# EAGLE board MCU board ATmega328p v2.4 (SN) (EAGLE 9.2.1)
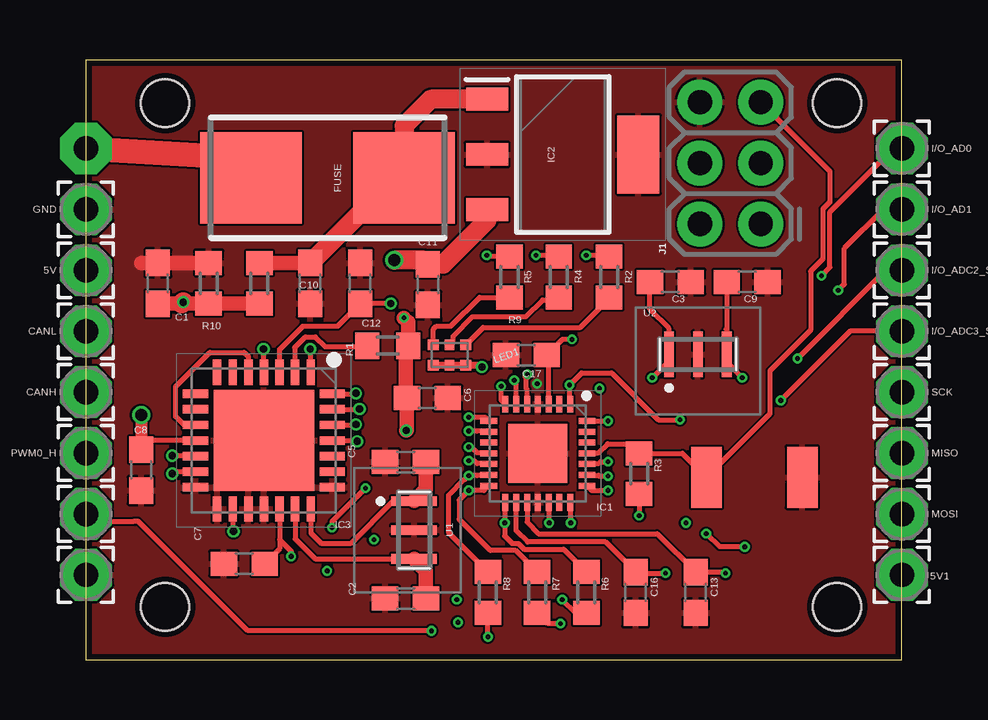
[diagram p0: board, top side]
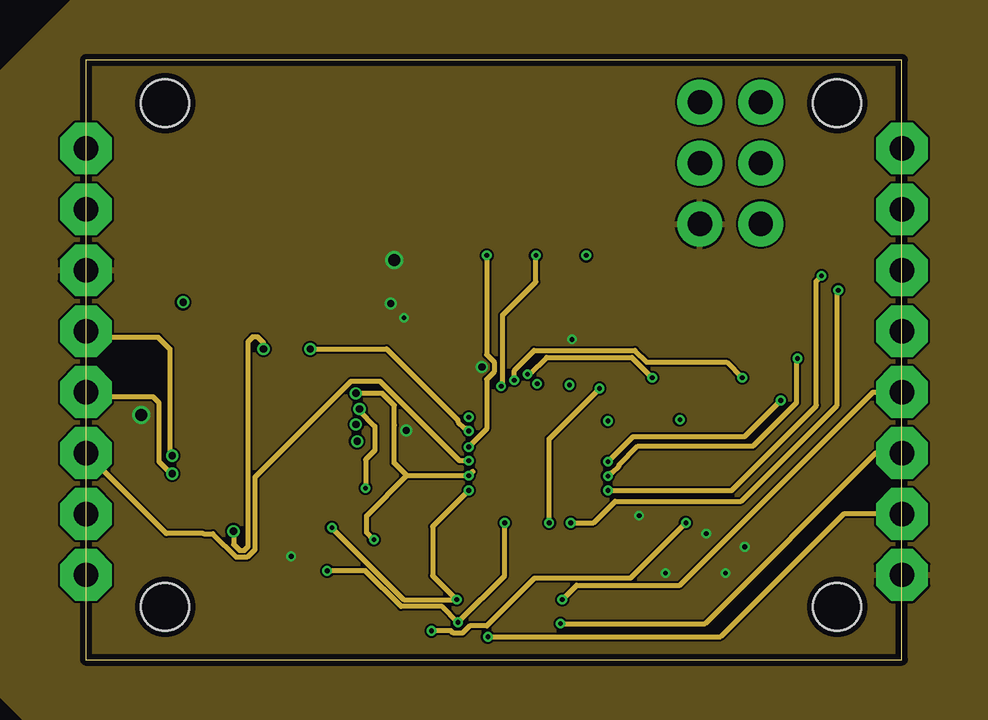
[diagram p1: board, inner layer Route2]
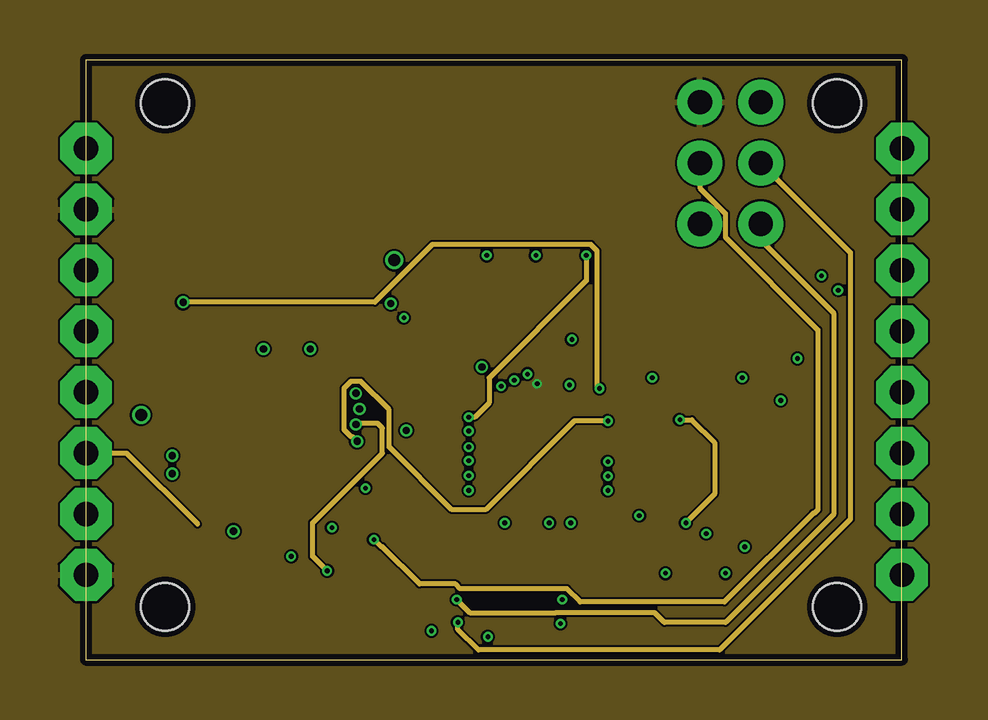
[diagram p2: board, inner layer Route3]
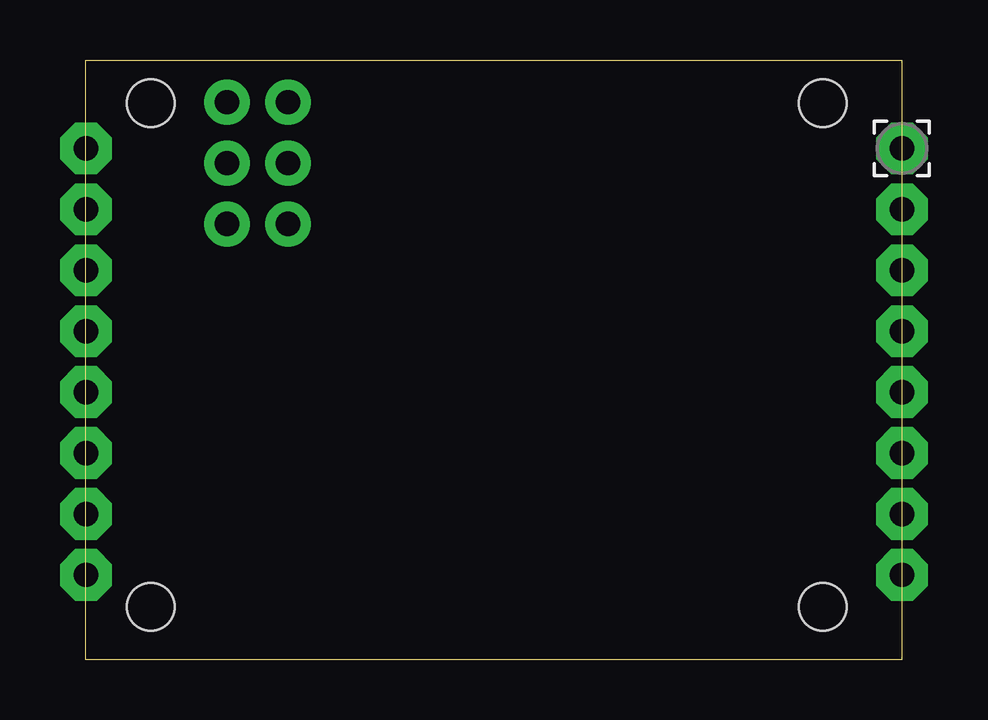
[diagram p3: board, bottom side, seen from below]

Size 34 x 25 mm. Coordinates in mm from the lower left corner, seen from the top.
Outline: 0,0 34,0 34,25 0,25 0,0
Copper layers (1*2*3*4): Top 0.035mm / dielectric 0.432mm / Route2 0.017mm / dielectric 0.432mm / Route3 0.017mm / dielectric 0.432mm / Route4 0.035mm
Design rules "JLC_4L_ACM_CAN *": minimum track width 3.5mil, minimum drill 0.2mm, track to track 3.5mil, track to pad 8mil, pad to pad 6mil, via to via 6mil, smd to smd 6mil, copper to edge 10mil, drill to drill 8mil, minimum pad ring 4mil, minimum via ring 4mil, stop-mask expansion 4mil, vias tented up to drill 25mil, thermal gap 4mil
Holes 2 mm at 3.3,23.2 31.3,23.2 3.3,2.2 31.3,2.2

## Footprints (pad centres in the part's own frame; a part is rotated, then mirrored left to right if it is on the bottom)
2,15/1,0 = drill 1.016 pad 2.159 octagon: 1 0,0
C0603 = smd 1.1 x 1: 1 -0.85,0; 2 0.85,0
0154001.DRT = smd 4.242 x 3.81: 1 -3.188,0; 2 3.188,0
QFN45P400X400X100-29N = smd 0.7 x 0.25: 1 -2.05,1.35; 2 -2.05,0.9; 3 -2.05,0.45; 4 -2.05,0; 5 -2.05,-0.45; 6 -2.05,-0.9; 7 -2.05,-1.35; 15 2.05,-1.35; 16 2.05,-0.9; 17 2.05,-0.45; 18 2.05,0; 19 2.05,0.45; 20 2.05,0.9; 21 2.05,1.35 | smd 0.25 x 0.7: 8 -1.35,-2.05; 9 -0.9,-2.05; 10 -0.45,-2.05; 11 0,-2.05; 12 0.45,-2.05; 13 0.9,-2.05; 14 1.35,-2.05; 22 1.35,2.05; 23 0.9,2.05; 24 0.45,2.05; 25 0,2.05; 26 -0.45,2.05; 27 -0.9,2.05; 28 -1.35,2.05 | smd 2.45 x 2.45: 29 0,0
SOT230P700X170-4N = smd 1.75 x 0.95: 1 -3.15,2.3; 2 -3.15,0; 3 -3.15,-2.3 | smd 1.75 x 3.25: 4 3.15,0
QFN65P600X600X100-29N = smd 1.05 x 0.35: 1 -2.85,1.95; 2 -2.85,1.3; 3 -2.85,0.65; 4 -2.85,0; 5 -2.85,-0.65; 6 -2.85,-1.3; 7 -2.85,-1.95; 15 2.85,-1.95; 16 2.85,-1.3; 17 2.85,-0.65; 18 2.85,0; 19 2.85,0.65; 20 2.85,1.3; 21 2.85,1.95 | smd 0.35 x 1.05: 8 -1.95,-2.85; 9 -1.3,-2.85; 10 -0.65,-2.85; 11 0,-2.85; 12 0.65,-2.85; 13 1.3,-2.85; 14 1.95,-2.85; 22 1.95,2.85; 23 1.3,2.85; 24 0.65,2.85; 25 0,2.85; 26 -0.65,2.85; 27 -1.3,2.85; 28 -1.95,2.85 | smd 4.2 x 4.2: 29 0,0
2X3-NS = drill 1.016 pad 1.88: 1 -2.54,-1.27; 2 -2.54,1.27; 3 0,-1.27; 4 0,1.27; 5 2.54,-1.27; 6 2.54,1.27
ROHM-1510-(0604) = smd 0.45 x 0.45: 1 -0.675,-0.425; 3 0.675,-0.425; 4 0.675,0.425; 6 -0.675,0.425 | smd 0.4 x 0.45: 2 0,-0.425; 5 0,0.425
R0603 = smd 1 x 1.1: 1 -0.85,0; 2 0.85,0
SMD1,27-2,54 = smd 1.27 x 2.54: 1 0,0
CSTNE16M0V530000R0 = smd 0.4 x 1.9: 1 -1.2,0.425; 2 0,0.425; 3 1.2,0.425

## Placement (x,y rotation side)
5V  5V_H  [2,15/1,0]  0,16.23 0 top
5V1  5V_LFT0  [2,15/1,0]  34,3.53 90 top
12V_H  12V  [2,15/1,0]  0,21.31 0 bottom
C1  0.1uF  [C0603]  3,15.69 90 top
C2  22pF  [C0603]  13.32,2.55 180 top
C3  22pF  [C0603]  24.35,15.75 0 top
C5  22pF  [C0603]  13.32,8.24 180 top
C6  0.1uF  [C0603]  14.22,10.9 0 top
C7  0.1uF  [C0603]  6.6,4 180 top
C8  0.1uF  [C0603]  2.3,7.9 270 top
C9  22pF  [C0603]  27.55,15.75 0 top
C10  10uF  [C0603]  9.34,15.69 270 top
C11  10uF  [C0603]  14.25,15.64 270 top
C12  0.1uF  [C0603]  11.43,15.69 90 top
C13  0.1uF  [C0603]  25.4,2.8 270 top
C16  0.1uF  [C0603]  22.9,2.8 270 top
C17  0.1uF  [C0603]  18.35,12.7 180 top
CANH  I/O_CANH_H  [2,15/1,0]  0,11.15 0 top
CANL  I/O_CANH_H  [2,15/1,0]  0,13.69 0 top
FUSE  0154005.DRT  [0154001.DRT]  10.07,20.09 0 top
GND  GND_H  [2,15/1,0]  0,18.77 0 top
GND30_H  GND  [2,15/1,0]  0,3.53 0 top
I/O_AD0  I/O_AD0_LFT7  [2,15/1,0]  34,21.31 90 top
I/O_AD1  I/O_AD1_LFT6  [2,15/1,0]  34,18.77 90 top
I/O_ADC2_SDA  I/O_ADC2_SDA_LFT5  [2,15/1,0]  34,16.23 90 top
I/O_ADC3_SCL  I/O_ADC3_SCL_LFT4  [2,15/1,0]  34,13.69 90 top
IC1  ATMEGA328P-MMH  [QFN45P400X400X100-29N]  18.83,8.6 270 top
IC2  MIC5239-5.0YS_TR  [SOT230P700X170-4N]  19.87,21.06 0 top
IC3  MCP25625-E_ML  [QFN65P600X600X100-29N]  7.42,9.13 270 top
J1  AVR_SPI_PROG_3X2NS  [2X3-NS]  26.85,20.7 90 top
LED1  SMLP36RGB2W3R  [ROHM-1510-(0604)]  15.15,12.7 180 top
MISO  MISO_LFT2  [2,15/1,0]  34,8.61 90 top
MOSI  MOSI_LFT1  [2,15/1,0]  34,6.07 90 top
PWM0_H  PWM0  [2,15/1,0]  0,8.61 0 top
PWM1_INT1_H  PWM0_INT  [2,15/1,0]  0,6.07 180 top
R1  10kOhm  [R0603]  12.57,13.09 180 top
R2  200Ohm  [R0603]  21.8,15.95 270 top
R3  10kOhm  [R0603]  23.05,7.75 270 top
R4  290Ohm  [R0603]  19.7,15.95 270 top
R5  190Ohm  [R0603]  17.65,15.95 270 top
R6  200Ohm  [R0603]  20.85,2.8 270 top
R7  200Ohm  [R0603]  18.8,2.8 270 top
R8  200Ohm  [R0603]  16.75,2.8 270 top
R9  3kOhm  [R0603]  7.22,15.69 90 top
R10  2kOhm  [R0603]  5.11,15.69 270 top
RES_PAD1  RES_PAD  [SMD1,27-2,54]  25.85,7.6 180 top
RES_PAD2  RES_PAD2  [SMD1,27-2,54]  29.85,7.6 180 top
SCK  SCK_LFT3  [2,15/1,0]  34,11.15 90 top
U1  CSTNE16M0V530000R0  [CSTNE16M0V530000R0]  13.25,5.4 270 top
U2  CSTNE16M0V530000R0  [CSTNE16M0V530000R0]  25.5,12.3 0 top

## Library data of the parts
5V 5V1 12V_H CANH CANL GND GND30_H I/O_AD0 I/O_AD1 I/O_ADC2_SDA I/O_ADC3_SCL MISO MOSI PWM0_H PWM1_INT1_H RES_PAD1 RES_PAD2 SCK = wirepad
C1-C3 C5-C13 C16 C17 = eagle-ltspice; SPICEMODEL: NONE; SPICEPREFIX: C
FUSE = 0154005(Fuseholder)DRT; ALLIED_NUMBER: 70184875; ALLIED_PRICE-STOCK: https://www.alliedelec.com/littelfuse-0154005-drt/70184875/; ARROW_PART_NUMBER: 0154005.DRT; ARROW_PRICE-STOCK: https://www.arrow.com/en/products/0154005.drt/littelfuse; DESCRIPTION: Littelfuse 5A T Surface Mount Fuse, 125V ac/dc; HEIGHT: mm; MANUFACTURER_NAME: LITTELFUSE; MANUFACTURER_PART_NUMBER: 0154005.DRT; RS_PART_NUMBER: 2196260P; RS_PRICE-STOCK: http://uk.rs-online.com/web/p/products/2196260P
IC1 = ATMEGA328P-MMH; ARROW_PART_NUMBER: ATMEGA328P-MMH; ARROW_PRICE-STOCK: https://www.arrow.com/en/products/atmega328p-mmh/microchip-technology; DESCRIPTION: Atmel ATMEGA328P-MMH, 8bit AVR Microcontroller, 20MHz, 32 kB Flash, 28-Pin QFN; HEIGHT: 1mm; MANUFACTURER_NAME: Microchip; MANUFACTURER_PART_NUMBER: ATMEGA328P-MMH; RS_PART_NUMBER: 1310272P; RS_PRICE-STOCK: http://uk.rs-online.com/web/p/products/1310272P
IC2 = MIC5239-5.0YS_TR; ARROW_PART_NUMBER: MIC5239-5.0YS TR; ARROW_PRICE-STOCK: http://uk.rs-online.com/web/p/products/7275535P; DESCRIPTION: LDO Regulator Pos 5V 0.5A Micrel MIC5239-5.0YS TR, LDO Voltage Regulator, 500mA, 5 V 1%, 2.3 30 Vin, 3 + Tab-Pin SOT-223; HEIGHT: 1.7mm; MANUFACTURER_NAME: Micrel; MANUFACTURER_PART_NUMBER: MIC5239-5.0YS TR; RS_PART_NUMBER: 7275535P; RS_PRICE-STOCK: http://uk.rs-online.com/web/p/products/7275535P
IC3 = MCP25625-E_ML; ALLIED_NUMBER: 70431541; ALLIED_PRICE-STOCK: http://www.alliedelec.com/microchip-technology-inc-mcp25625-e-ml/70431541/; ARROW_PART_NUMBER: MCP25625-E/ML; ARROW_PRICE-STOCK: https://www.arrow.com/en/products/mcp25625-eml/microchip-technology; DESCRIPTION: CAN Controller with Transceiver QFN28 Microchip MCP25625-E/ML, CAN Controller, 28-Pin QFN; HEIGHT: 1mm; MANUFACTURER_NAME: Microchip; MANUFACTURER_PART_NUMBER: MCP25625-E/ML; RS_PART_NUMBER: 1654104; RS_PRICE-STOCK: http://uk.rs-online.com/web/p/products/1654104
J1 = SparkFun-Connectors
LED1 = SMLP36RGB2W3R; ARROW_PART_NUMBER: SMLP36RGB2W3R; ARROW_PRICE-STOCK: https://www.arrow.com/en/products/smlp36rgb2w3r/rohm-semiconductor; DESCRIPTION: LED,RGB,35/110/35mcd,top-looking,1510 ROHM SMLP36RGB2W3R, SML-P36 Series 3 RGB LED, 475 (Blue) nm, 535 (Green) nm, 629 (Red) nm 6-Pin Milky White; HEIGHT: mm; MANUFACTURER_NAME: ROHM Semiconductor; MANUFACTURER_PART_NUMBER: SMLP36RGB2W3R; RS_PART_NUMBER: 1246884P; RS_PRICE-STOCK: http://uk.rs-online.com/web/p/products/1246884P
R1-R10 = eagle-ltspice; SPICEMODEL: NONE; SPICEPREFIX: R
U1 U2 = CSTNE16M0V530000R0; ARROW_PART_NUMBER: CSTNE16M0V530000R0; ARROW_PRICE-STOCK: https://www.arrow.com/en/products/cstne16m0v530000r0/murata-manufacturing; DESCRIPTION: Resonators 16.0000MHz 15pF SMD CHP Resntr; HEIGHT: 1mm; MANUFACTURER_NAME: Murata Electronics; MANUFACTURER_PART_NUMBER: CSTNE16M0V530000R0

## Nets
5V: 5V1.1 5V.1 C6.1 C7.1 C8.1 C11.1 C12.1 C13.1 C16.1 C17.1 IC1.3 IC1.16 IC1.17 IC2.3 IC3.3 IC3.11 IC3.19 J1.2 LED1.4 LED1.5 LED1.6 R1.1 R3.2
12V_FUSED: C10.1 FUSE.2 IC2.1 R9.2
12V_UNFUSED: 12V_H.1 FUSE.1
BLUE_LED: IC1.11 R5.1
CAN_CS: IC1.9 IC3.1
CAN_INT: IC1.28 IC3.25
CAN_OSC1: C5.1 IC3.21 U1.1
CAN_OSC2: C2.1 IC3.20 U1.3
CANH: CANH.1 IC3.13
CANL: CANL.1 IC3.12
GND: C1.2 C2.2 C3.2 C5.2 C6.2 C7.2 C8.2 C9.2 C10.2 C11.2 C12.2 C13.2 C16.2 C17.2 GND30_H.1 GND.1 IC1.4 IC1.18 IC1.29 IC2.2 IC2.4 IC3.14 IC3.15 IC3.17 IC3.18 IC3.22 IC3.29 J1.6 R10.1 RES_PAD2.1 U1.2 U2.2
GREEN_LED: IC1.8 R2.1
I/O_ADC3: I/O_ADC3_SCL.1 IC1.24
I/O_D2_INT: IC1.1 PWM1_INT1_H.1
I/OAD0: I/O_AD0.1 IC1.22
I/OADC2: I/O_ADC2_SDA.1 IC1.23
MCU_OSC1: C3.1 IC1.5 U2.1
MCU_OSC2: C9.1 IC1.6 U2.3
MISO: IC1.14 IC3.27 J1.1 R7.1
MOSI: IC1.13 IC3.28 J1.4 R8.1
N$1: IC3.2 R1.2
N$2: IC1.12 PWM0_H.1
N$3: I/O_AD1.1 IC1.21
N$4: LED1.1 R2.2
N$8: LED1.2 R4.2
N$9: LED1.3 R5.2
N$10: R6.2 SCK.1
N$11: MISO.1 R7.2
N$12: MOSI.1 R8.2
RED_LED: IC1.7 R4.1
RESET_MCU: IC1.25 J1.5 R3.1 RES_PAD1.1
RXCAN: IC3.5 IC3.10
SCK: IC1.15 IC3.26 J1.3 R6.1
TXCAN: IC3.4 IC3.16
VOLTAGE_CHECK: C1.1 IC1.19 R9.1 R10.2

## Tracks (layer width: path | path; a pad name or v marks a point on that pad's centre or on a via)
5V  (via drill 0.2 layers 1-4, 0.3 layers 1-4, 0.5 layers 1-4)
  Top 0.2: 4.54,9.1 IC3.11 2.73,9.13 2.35,8.75 C8.1 | C12.1 11.2,15.09 | C12.1 10.47,13.89 9.03,13.89 8.07,12.93 IC3.3 | v12.7,14.85 C12.1 | 18.75,12.7 C17.1 | IC3.19 8.07,5 | 8.07,5 8.07,4.62 C7.1 | v20.25,13.35 19.85,13.35 C17.1 | IC1.3 19.26,10.67 19.26,12.64 C17.1 | IC1.16 17.93,5.37 18.4,4.9 21.65,4.9 C16.1 22.95,3.6 v24.15,3.6 | IC1.17 18.38,5.72 18.85,5.25 23.8,5.25 C13.1 26.6,3.65 v26.65,3.6 | R3.2 v23.05,6 | 8.07,5 8.55,4.52 v8.55,4.3 | v27.45,4.7 26.4,4.7 v25.85,5.25
  Top 0.3: LED1.4 LED1.5 LED1.6 16.43,12.28 v16.5,12.2
  Top 0.305: LED1.4 14.45,12.25
  Top 0.5: v2.3,10.2 C8.1
  Top 0.6: v13.35,9.55 13.38,9.57 C6.1 13.32,10.95 13.32,12.99 R1.1 13.43,14.07 v13.25,14.25
  Top 0.8: 14.4,16.49 C11.1 | IC2.3 16.72,18.32 14.89,16.49 C11.1 | C11.1 14.09,16.65 v12.85,16.65
  pour Route2: -16.5,11.5 1,29 39,29 44,24 44,-2 37,-9 4,-9
12V_FUSED
  Top 0.6: C10.1 R9.2
  Top 0.8: C10.1 13.26,20.46 FUSE.2 13.26,22.26 14.36,23.36 IC2.1
12V_UNFUSED
  Top 1.016: FUSE.1 6.02,20.95 12V_H.1
BLUE_LED  (via drill 0.2 layers 1-4)
  Top 0.2: R5.1 16.75,16.8 v16.7,16.85 | IC1.11 16.76,8.62 16.3,8.62 16.07,8.86 v15.95,8.86
  Route2 0.2: v15.95,8.86 16.7,9.61 16.7,11.69 17,11.99 17,12.41 16.7,12.71 v16.7,16.85
CAN_CS  (via drill 0.2 layers 1-4, 0.3 layers 1-4)
  Top 0.2: IC3.1 9.37,12.93 v9.35,12.95 | IC1.9 16.76,9.52 16.3,9.52 16.3,9.53 v15.95,9.53
  Route2 0.2: v9.35,12.95 12.53,12.95 15.5,9.98 15.5,9.91 15.76,9.65 15.83,9.65 v15.95,9.53
CAN_INT  (via drill 0.2 layers 1-4, 0.3 layers 1-4)
  Top 0.2: IC3.25 11.3,9.13 v11.3,9.1 | IC1.28 v21.75,9.95
  Route3 0.2: v21.75,9.95 20.35,9.95 16.65,6.25 15.25,6.25 12.64,8.86 12.64,10.42 11.46,11.6 11.04,11.6 10.75,11.31 10.75,9.59 11.04,9.3 11.1,9.3 v11.3,9.1
CAN_OSC1
  Top 0.2: U1.1 12.81,6.61 11.05,4.85 9.8,4.85 9.37,5.28 IC3.21 9.35,6.26
  Top 0.6: C5.1 14.17,7.09 U1.1
CAN_OSC2
  Top 0.2: IC3.20 8.72,5.03 9.55,4.2 U1.3
  Top 0.6: C2.1 14.17,3.71 U1.3
CANH  (via drill 0.3 layers 1-4)
  Top 0.2: IC3.13 3.68,7.83 v3.6,7.75
  Route2 0.2: v3.6,7.75 3.55,7.75 3.05,8.25 3.05,10.7 2.8,10.95 0.16,10.95 CANH.1
CANL  (via drill 0.3 layers 1-4)
  Top 0.2: IC3.12 3.62,8.48 v3.6,8.5
  Route2 0.2: v3.6,8.5 3.5,8.6 3.5,12.95 3.02,13.43 0.1,13.43 CANL.1
GND  (via drill 0.2 layers 1-4)
  Top 0.6: R10.1 C1.2 2.3,16.54
  other vias: 18.8,11.5
  pour Route3: -15,20 -5,30 -2,30 45,30 48,27 48,25 48,-1 47,-2 47,-4 39,-12 -6,-12 -15,-3
  pour Top: 34,0 0,0 0,25 34,25
GREEN_LED  (via drill 0.2 layers 1-4)
  Top 0.2: R2.1 21.75,16.85 v20.85,16.85 | IC1.8 16.63,10.1 v15.95,10.1
  Route3 0.2: v20.85,16.85 20.85,15.8 16.8,11.75 16.8,10.7 16.2,10.1 v15.95,10.1
I/O_ADC3  (via drill 0.2 layers 1-4)
  Top 0.2: v28.95,10.8 31.84,13.69 I/O_ADC3_SCL.1 | IC1.24 20.9,8.17 21.36,8.17 21.43,8.25 v21.75,8.25
  Route2 0.2: v21.75,8.25 22.8,9.3 27.45,9.3 v28.95,10.8
I/O_D2_INT  (via drill 0.2 layers 1-4)
  Top 0.2: IC1.1 20.16,10.67 20.16,11.13 20.15,11.13 v20.15,11.45 20.65,11.95 21.9,11.95 23.85,10 v24.75,10 | v14.4,1.2 6.75,1.2 2.18,5.77 2,5.77 0.3,5.77 | 0.3,5.77 0.1,5.77 | PWM1_INT1_H.1 0.3,5.77
  Route2 0.2: v25,5.7 22.69,3.39 18.69,3.39 16.7,1.4 16,1.4 15.69,1.1 15.31,1.1 15.21,1.2 v14.4,1.2
  Route3 0.2: v24.75,10 25.25,10 26.2,9.05 26.2,6.9 v25,5.7
I/OAD0  (via drill 0.2 layers 1-4)
  Top 0.2: v30.65,16 31,16.35 31,18.66 33.65,21.31 I/O_AD0.1 | IC1.22 21.08,7.05 v21.75,7.05
  Route2 0.2: v21.75,7.05 26.9,7.05 30.43,10.57 | 30.43,10.57 30.45,10.6 | 30.43,10.57 30.43,15.78 v30.65,16
I/OADC2  (via drill 0.2 layers 1-4)
  Top 0.2: v29.65,12.55 33.33,16.23 I/O_ADC2_SDA.1 | IC1.23 20.9,7.68 21.36,7.68 21.38,7.65 v21.75,7.65
  Route2 0.2: v21.75,7.65 21.9,7.8 21.94,7.8 22.2,8.06 22.2,8.1 23,8.9 27.8,8.9 29.6,10.7 29.6,12.5 v29.65,12.55
MCU_OSC1  (via drill 0.2 layers 1-4)
  Top 0.2: C3.1 23.5,14.6 24.3,13.8 U2.1 24.3,12.45 v23.6,11.75 | 18.38,11.72 18.3,11.8 | IC1.5 18.38,11.28 18.35,11.31 18.35,11.69 18.38,11.72 | v18.4,11.9 18.38,11.88 18.38,11.72
  Route2 0.2: v18.4,11.9 18.5,11.9 19.2,12.6 22.75,12.6 v23.6,11.75
MCU_OSC2  (via drill 0.2 layers 1-4)
  Top 0.2: C9.1 U2.3 | U2.3 26.7,13.8 26.68,13.78 | IC1.6 17.93,11.57 v17.85,11.65 | U2.3 26.7,12.4 v27.35,11.75
  Route2 0.2: v17.85,11.65 17.85,12.06 18.68,12.89 22.87,12.89 23.36,12.4 26.7,12.4 v27.35,11.75
MISO  (via drill 0.2 layers 1-4, 0.3 layers 1-4)
  Top 0.2: IC3.27 11.38,10.43 v11.4,10.45 | IC1.14 16.58,7.05 v15.95,7.05 15.55,6.65 15.55,5.85 16.85,4.55 17.9,4.55 R7.1 | v11.65,7.15 10.25,5.75 v10.25,5.5
  Route2 0.2: v15.95,7.05 14.45,5.55 14.45,3.5 v15.45,2.5 13.25,2.5 v10.25,5.5 | v11.4,10.45 11.4,10.36 12.04,9.72 12.04,8.73 11.65,8.33 v11.65,7.15
  Route3 0.2: J1.1 28.12,17.48 31.15,14.45 31.15,6.05 26.65,1.55 24.1,1.55 23.7,1.95 19.59,1.95 19.58,1.95 16,1.95 v15.45,2.5
MOSI  (via drill 0.2 layers 1-4, 0.3 layers 1-4)
  Top 0.2: IC3.28 11.23,11.08 v11.25,11.1 | IC1.13 16.76,7.68 16.3,7.68 16.3,7.67 v15.95,7.67 15.78,7.5 15.76,7.5 15.11,6.85 15.11,5.29 R8.1
  Route2 0.2: 11.35,11 v11.25,11.1 12.35,11.1 12.85,10.6 12.85,9.76 12.85,8.19 13.37,7.67 | 16.14,7.84 16.12,7.84 v15.95,7.67 13.37,7.67 | v12,5 11.7,5.3 11.7,6 13.37,7.67
  Route3 0.2: J1.4 25.58,19.67 26.64,18.6 26.64,17.61 30.5,13.75 30.5,6.25 30.35,6.1 30.3,6.1 26.6,2.4 20.59,2.4 20.04,2.95 15.6,2.95 15.4,3.15 13.9,3.15 12.35,4.7 12.3,4.7 v12,5
N$1
  Top 0.2: 8.7,12 IC3.2 8.7,12 8.7,13.01 9.14,13.45 9.56,13.45 9.96,13.05 11.69,13.05 R1.2
N$2  (via drill 0.2 layers 1-4)
  Top 0.2: IC1.12 16.76,8.17 16.3,8.17 16.19,8.29 v15.95,8.29
  Route2 0.2: v15.95,8.29 15.57,8.29 12.26,11.6 11.04,11.6 7.04,7.6 7.04,4.58 6.72,4.26 6.28,4.26 5.29,5.25 4.9,5.25 4.89,5.26 3.35,5.26 PWM0_H.1
  Route3 0.2: 4.65,5.65 1.69,8.61 PWM0_H.1
N$3  (via drill 0.2 layers 1-4)
  Top 0.2: IC1.21 20.18,5.72 v20.2,5.7 | v31.35,15.4 31.6,15.65 31.6,17.15 33.22,18.77 I/O_AD1.1
  Route2 0.2: v20.2,5.7 21.15,5.7 22.05,6.6 27.3,6.6 31.3,10.6 31.3,15.35 v31.35,15.4
N$4
  Top 0.2: LED1.1 16.55,13.85 20.6,13.85 21.8,15.05 R2.2
N$8
  Top 0.2: R4.2 19.7,15 19.03,15 18.33,14.3 16.12,14.3 15.3,13.48 15.3,13.27 LED1.2
N$9
  Top 0.2: LED1.3 14.47,13.78 14.6,13.9 15.2,13.9 16.4,15.1 R5.2
N$10  (via drill 0.2 layers 1-4)
  Top 0.2: v19.85,2.5 20.4,1.95 R6.2
  Route2 0.2: v19.85,2.5 20.45,3.1 24.75,3.1 32.8,11.15 SCK.1
N$11  (via drill 0.2 layers 1-4)
  Top 0.2: v19.77,1.5 19.25,1.5 R7.2
  Route2 0.2: v19.77,1.5 25.8,1.5 32.91,8.61 MISO.1
N$12  (via drill 0.2 layers 1-4)
  Top 0.2: v16.75,0.95 R8.2
  Route2 0.2: v16.75,0.95 26.45,0.95 31.57,6.07 MOSI.1
RED_LED  (via drill 0.2 layers 1-4)
  Top 0.2: R4.1 19.65,16.85 v18.75,16.85 | IC1.7 17.3,10.83 v17.3,11.4
  Route2 0.2: v17.3,11.4 17.35,11.45 17.35,14.35 18.75,15.75 v18.75,16.85
RESET_MCU
  Top 0.2: J1.5 31,20.36 31,19.07 30.71,18.78 30.71,16.7 30.2,16.19 30.2,13.74 28.5,12.04 28.5,10.25 RES_PAD1.1 24.85,8.6 R3.1 22.65,9 21.73,9 21.36,8.62 20.9,8.62 IC1.25
RXCAN
  Top 0.2: 6.75,12 IC3.5 6.77,12.63 6.59,12.81 5.17,12.81 3.74,11.38 3.74,10.13 4.12,9.75 4.54,9.75 IC3.10
SCK  (via drill 0.2 layers 1-4, 0.3 layers 1-4)
  Top 0.2: IC3.26 11.23,9.78 v11.25,9.8 | R6.1 19.9,4.6 18.26,4.6 18.02,4.84 17.76,4.84 17.45,5.15 v17.45,5.7 17.45,6.52 IC1.15
  Route2 0.2: v17.45,5.7 17.45,3.5 v15.5,1.55 14.84,2.21 13.13,2.21 11.64,3.7 v10.05,3.7
  Route3 0.2: J1.3 31.85,16.97 31.85,5.85 26.4,0.4 16.35,0.4 15.5,1.25 v15.5,1.55 | v10.05,3.7 9.45,4.3 9.45,5.7 12.35,8.6 12.35,9.65 12.15,9.85 11.3,9.85 v11.25,9.8
TXCAN  (via drill 0.3 layers 1-4)
  Top 0.2: IC3.4 7.4,12 v7.4,12.95 | IC3.16 6.12,5.38 v6.15,5.35
  Route2 0.2: v6.15,5.35 6.15,4.8 6.4,4.55 6.6,4.55 6.75,4.7 6.75,13.25 6.95,13.45 7.15,13.45 7.4,13.2 v7.4,12.95
VOLTAGE_CHECK  (via drill 0.2 layers 1-4, 0.3 layers 1-4)
  Top 0.2: IC1.19 19.28,5.72 v19.3,5.7
  Top 0.6: R9.1 R10.2 3.99,14.84 C1.1
  Top 0.813: 3.99,14.84 v4.05,14.9
  Route2 0.2: v19.3,5.7 19.3,9.2 v21.4,11.3
  Route3 0.2: v4.05,14.9 12.04,14.9 14.44,17.3 21.04,17.3 21.3,17.04 21.3,11.4 v21.4,11.3